# Altium PCB electrode_module3.3(1).PcbDoc
Units mm, origin at the board's own origin, x right, y up, seen from the top; angles counter-clockwise.
Board outline 69.48 x 24.97 mm, 2 copper layers (F.Cu, B.Cu); 56 components, 39 nets, 122 pads, 20 vias.
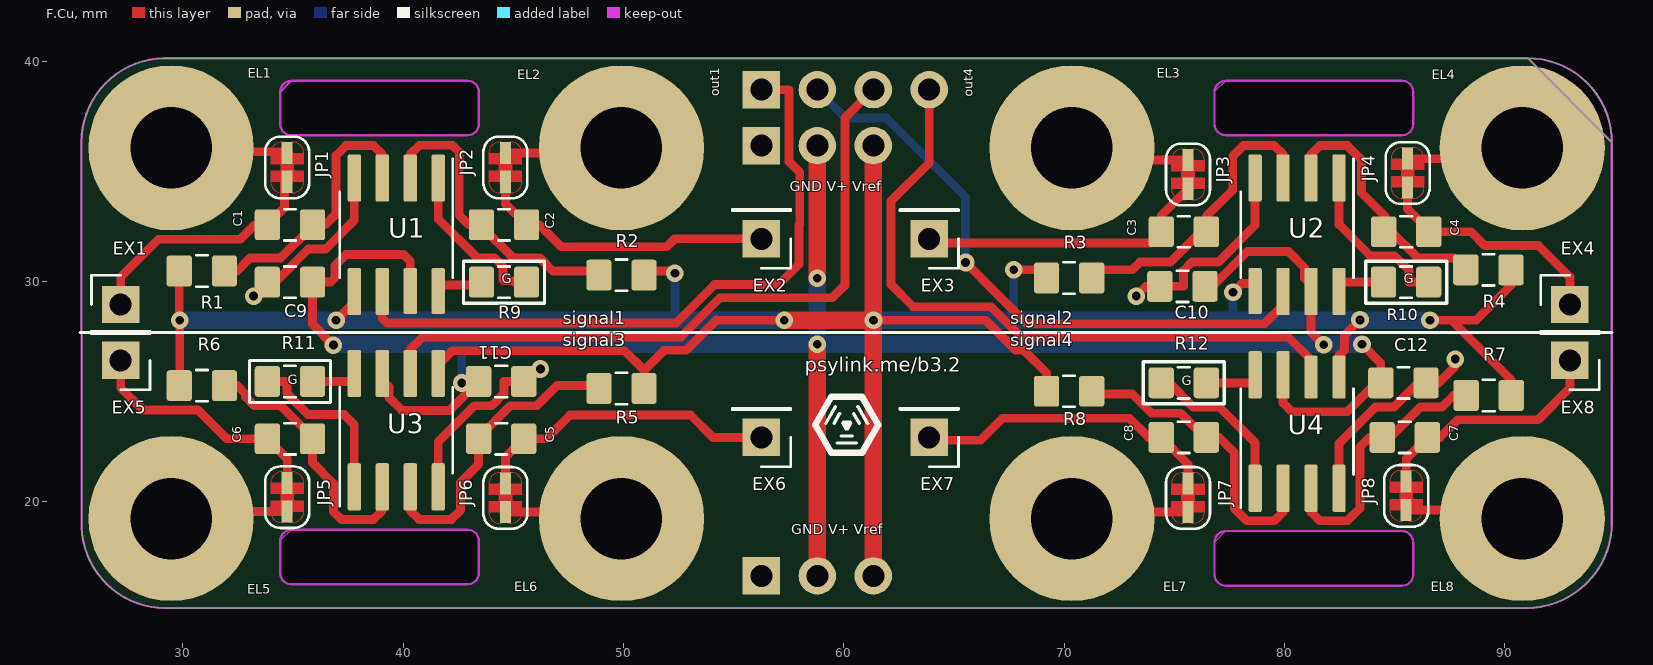
[diagram p0: F.Cu view]
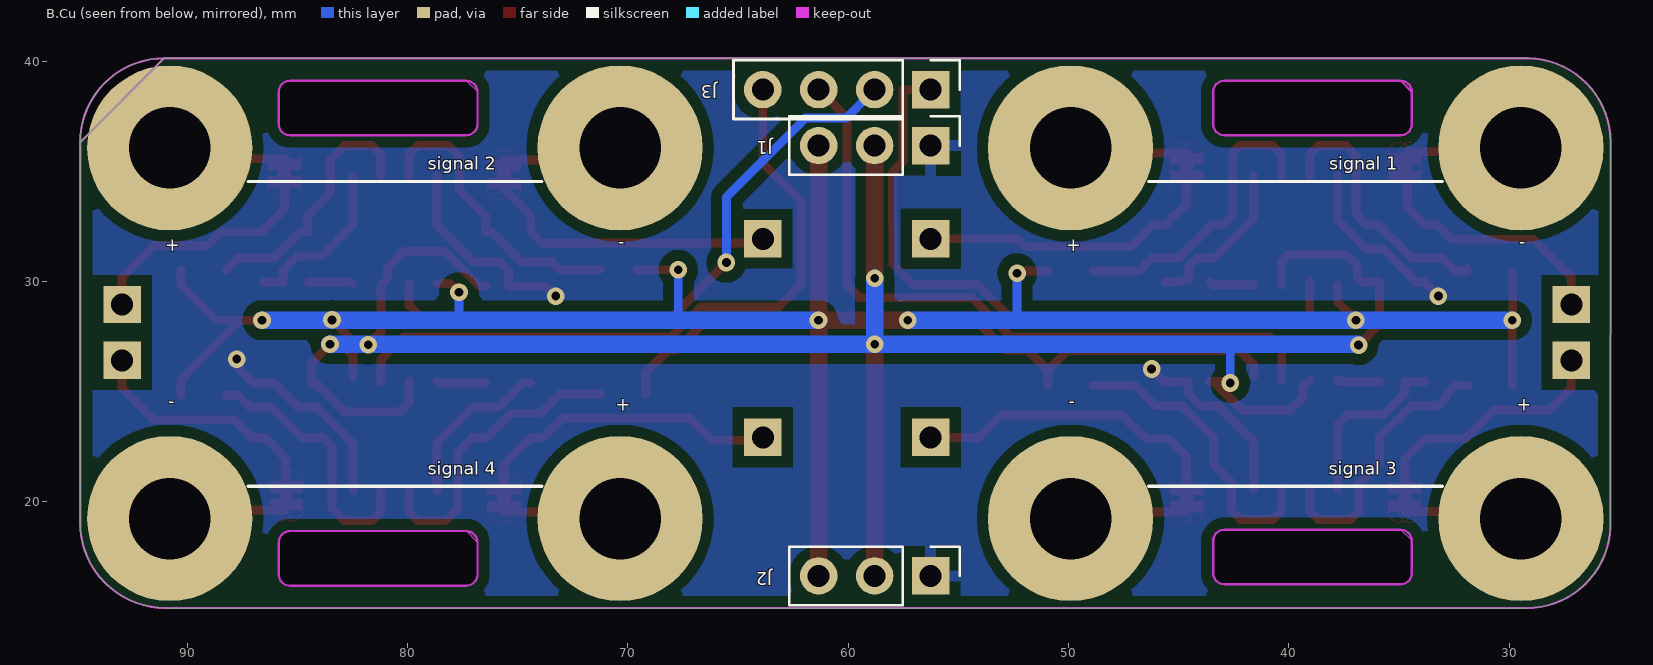
[diagram p1: B.Cu view, seen from below]

## Layer stack, top to bottom
F.Mask: solder mask 0.0102, Solder Resist, Dk 3.5
F.Cu: signal copper 0.0356
Dielectric 1: dielectric 0.32, FR-4, Dk 4.8
B.Cu: signal copper 0.0356
B.Mask: solder mask 0.0102, Solder Resist, Dk 3.5

## Board outline
94.869,36.322 ccw(c91.059,36.322) 91.059,40.132 29.464,40.132 ccw(c29.21,36.322) 25.392,36.322 25.4,18.86 ccw(c29.21,18.986) 29.21,15.174 90.995,15.176 ccw(c90.995,19.05) 94.869,19.05 94.869,36.322 ccw(c91.059,36.322) 94.869,36.322
cut-out: 34.925,39.126 34.727,39.087 34.559,38.974 34.446,38.806 34.407,38.608 34.417,38.608 34.407,37.148 34.446,36.949 34.559,36.781 34.727,36.669 34.925,36.63 34.925,36.639 42.926,36.63 43.124,36.669 43.292,36.781 43.405,36.949 43.444,37.148 43.434,37.148 43.444,38.608 43.405,38.806 43.292,38.974 43.124,39.087 42.926,39.126 42.926,39.116 34.925,39.126 34.727,39.087 34.559,38.974 34.446,38.806 34.407,38.608 34.925,39.116
cut-out: 77.343,18.679 77.145,18.64 76.977,18.527 76.864,18.359 76.825,18.161 76.835,18.161 76.825,16.7 76.864,16.502 76.977,16.334 77.145,16.222 77.343,16.183 77.343,16.192 85.344,16.183 85.542,16.222 85.71,16.334 85.823,16.502 85.862,16.7 85.852,16.7 85.862,18.161 85.823,18.359 85.71,18.527 85.542,18.64 85.344,18.679 85.344,18.669 77.343,18.679 77.145,18.64 76.977,18.527 76.864,18.359 76.825,18.161 76.835,18.161
cut-out: 76.825,38.608 76.864,38.806 76.977,38.974 77.145,39.087 77.343,39.126 77.343,39.116 85.344,39.126 85.542,39.087 85.71,38.974 85.823,38.806 85.862,38.608 85.852,38.608 85.862,37.148 85.823,36.949 85.71,36.781 85.542,36.669 85.344,36.63 85.344,36.639 77.343,36.639 77.343,36.63 77.145,36.669 76.977,36.781 76.864,36.949 76.825,37.148 76.835,37.148 76.825,38.608 76.864,38.806 76.977,38.974 77.145,39.087 77.343,39.126 77.343,39.116
cut-out: 34.407,18.224 34.446,18.423 34.559,18.591 34.727,18.703 34.925,18.742 34.925,18.732 42.926,18.742 43.124,18.703 43.292,18.591 43.405,18.423 43.444,18.224 43.434,18.224 43.444,16.764 43.405,16.566 43.292,16.398 43.124,16.285 42.926,16.246 42.926,16.256 34.925,16.256 34.925,16.246 34.727,16.285 34.559,16.398 34.446,16.566 34.407,16.764 34.417,16.764 34.407,18.224 34.446,18.423 34.559,18.591 34.727,18.703 34.925,18.742 34.925,18.732

## Design rules (kind name [scope] priority, off if disabled: settings)
Clearance "Clearence 0.508_Polygon" [InNamedPolygon('B.Cu-Earth')] p1: gap=0.508 ignorepadtopadclearanceinfootprint=FALSE
Clearance "Clearence 0.2_NetClass" [InNetClass('Default')] p2: gap=0.2 ignorepadtopadclearanceinfootprint=FALSE
HoleSize "Hole Size (Default)" [All] p1: absolutevalues=TRUE maxlimit=10 minlimit=0 maxpercent=80.000 minpercent=20.000
MinimumSolderMaskSliver [All] p1: minsoldermaskwidth=0
PolygonConnect Polygon_B.Cu-Earth_ConnectDirect [IsNamedPolygon('B.Cu-Earth') vs IsVia] p1: connectstyle=Direct reliefconductorwidth=0.254 reliefentries=4 polygonreliefangle="90 Angle" airgapwidth=0.254
PolygonConnect Polygon_B.Cu-Earth_ConnectRelief45 [IsNamedPolygon('B.Cu-Earth') vs (IsThruPin or IsSMTPin) and (PadShape_AllLayers = 'Round')] p2: connectstyle=Relief reliefconductorwidth=0.508 reliefentries=4 polygonreliefangle="45 Angle" airgapwidth=0.508
PolygonConnect Polygon_B.Cu-Earth_ConnectRelief90 [IsNamedPolygon('B.Cu-Earth') vs (IsThruPin or IsSMTPin) and (PadShape_AllLayers <> 'Round')] p3: connectstyle=Relief reliefconductorwidth=0.508 reliefentries=4 polygonreliefangle="90 Angle" airgapwidth=0.508
RoutingVias [All] p1: holewidth=0.711 width=1.27 viastyle="Through Hole" minholewidth=0.711 minwidth=1.27 maxholewidth=0.711 maxwidth=1.27
SilkToSilkClearance [All] p1: silktosilkclearance=0
SilkToSolderMaskClearance [IsPad] p1: minsilkscreentomaskgap=0 clearancetoexposedcopper=TRUE
SolderMaskExpansion [All] p1: expansion=0.102 istentingtop=FALSE
Width [All] p1: maxlimit=10 minlimit=0.2 preferedwidth=0.25 minimp=50.000000 maximp=50.000000 favimp=50.000000
26 further rules are at their usual default settings.

## Classes and differential pairs
net class Default: Earth GNDS in1 in2 in3 in4 in5 in6 in7 in8 Net-(C1-Pad2) Net-(C2-Pad1) Net-(C3-Pad2) Net-(C4-Pad1) Net-(C5-Pad2) Net-(C6-Pad1) Net-(C7-Pad2) Net-(C8-Pad1) Net-(EL1-Pad1) Net-(EL2-Pad1) Net-(EL3-Pad1) Net-(EL4-Pad1) Net-(EL5-Pad1) Net-(EL6-Pad1) Net-(EL7-Pad1) Net-(EL8-Pad1) Net-(R9-Pad1) Net-(R9-Pad2) Net-(R10-Pad1) Net-(R10-Pad2) Net-(R11-Pad1) Net-(R11-Pad2) Net-(R12-Pad1) Net-(R12-Pad2) out1 out2 out3 out4 VCC

## Components (designator, comment, footprint, x,y, rotation, side; value= is the part's Value field where it differs from the comment)
C1 "100pF" C_0805_2012Metric_Pad1.15x1.40mm_HandSolder 34.861,32.575 r0 top
C2 "100pF" C_0805_2012Metric_Pad1.15x1.40mm_HandSolder 44.577,32.575 r0 top
C3 "100pF" C_0805_2012Metric_Pad1.15x1.40mm_HandSolder 75.438,32.258 r0 top
C4 "100pF" C_0805_2012Metric_Pad1.15x1.40mm_HandSolder 85.534,32.258 r0 top
C5 "100pF" C_0805_2012Metric_Pad1.15x1.40mm_HandSolder 44.45,22.86 r180 top
C6 "100pF" C_0805_2012Metric_Pad1.15x1.40mm_HandSolder 34.861,22.86 r180 top
C7 "100pF" C_0805_2012Metric_Pad1.15x1.40mm_HandSolder 85.471,22.924 r180 top
C8 "100pF" C_0805_2012Metric_Pad1.15x1.40mm_HandSolder 75.438,22.924 r180 top
C9 "100nF" C_0805_2012Metric_Pad1.15x1.40mm_HandSolder 34.861,29.972 r180 top
C10 "100nF" C_0805_2012Metric_Pad1.15x1.40mm_HandSolder 75.374,29.781 r180 top
C11 "100nF" C_0805_2012Metric_Pad1.15x1.40mm_HandSolder 44.45,25.463 r0 top
C12 "100nF" C_0805_2012Metric_Pad1.15x1.40mm_HandSolder 85.407,25.4 r0 top
EL1 "Electrode" MountingHole_3.7mm_Pad 29.464,36.068 r270 top
EL2 "Electrode" MountingHole_3.7mm_Pad 49.911,36.068 r270 top
EL3 "Electrode" MountingHole_3.7mm_Pad 70.358,36.068 r270 top
EL4 "Electrode" MountingHole_3.7mm_Pad 90.805,36.068 r270 top
EL5 "Electrode" MountingHole_3.7mm_Pad 29.464,19.241 r270 top
EL6 "Electrode" MountingHole_3.7mm_Pad 49.911,19.241 r270 top
EL7 "Electrode" MountingHole_3.7mm_Pad 70.358,19.241 r270 top
EL8 "Electrode" MountingHole_3.7mm_Pad 90.805,19.241 r270 top
EX1 "ElectrodeTestPin" PinHeader_1x01_P2.54mm_Vertical 27.178,28.956 r0 top
EX2 "ElectrodeTestPin" PinHeader_1x01_P2.54mm_Vertical 56.261,31.941 r180 top
EX3 "ElectrodeTestPin" PinHeader_1x01_P2.54mm_Vertical 63.881,31.941 r180 top
EX4 "ElectrodeTestPin" PinHeader_1x01_P2.54mm_Vertical 92.964,28.956 r0 top
EX5 "ElectrodeTestPin" PinHeader_1x01_P2.54mm_Vertical 27.178,26.416 r180 top
EX6 "ElectrodeTestPin" PinHeader_1x01_P2.54mm_Vertical 56.261,22.924 r180 top
EX7 "ElectrodeTestPin" PinHeader_1x01_P2.54mm_Vertical 63.881,22.924 r180 top
EX8 "ElectrodeTestPin" PinHeader_1x01_P2.54mm_Vertical 92.964,26.416 r180 top
J1 "PowerInput" PinHeader_1x03_P2.54mm_Vertical 56.261,36.17 r90 bottom
J2 "PowerPassThru" PinHeader_1x03_P2.54mm_Vertical 56.261,16.637 r90 bottom
J3 "OutputPins" PinHeader_1x04_P2.54mm_Vertical 56.261,38.71 r90 bottom
JP1 "SolderJumper_2_Bridged" SolderJumper-2_P1.3mm_Bridged_RoundedPad1.0x1.5mm 34.734,35.179 r90 top
JP2 "SolderJumper_2_Bridged" SolderJumper-2_P1.3mm_Bridged_RoundedPad1.0x1.5mm 44.64,35.179 r90 top
JP3 "SolderJumper_2_Bridged" SolderJumper-2_P1.3mm_Bridged_RoundedPad1.0x1.5mm 75.629,34.861 r90 top
JP4 "SolderJumper_2_Bridged" SolderJumper-2_P1.3mm_Bridged_RoundedPad1.0x1.5mm 85.598,34.925 r90 top
JP5 "SolderJumper_2_Bridged" SolderJumper-2_P1.3mm_Bridged_RoundedPad1.0x1.5mm 34.734,20.208 r270 top
JP6 "SolderJumper_2_Bridged" SolderJumper-2_P1.3mm_Bridged_RoundedPad1.0x1.5mm 44.64,20.178 r270 top
JP7 "SolderJumper_2_Bridged" SolderJumper-2_P1.3mm_Bridged_RoundedPad1.0x1.5mm 75.629,20.178 r270 top
JP8 "SolderJumper_2_Bridged" SolderJumper-2_P1.3mm_Bridged_RoundedPad1.0x1.5mm 85.534,20.272 r270 top
R1 "1M/1%" R_0805_2012Metric_Pad1.15x1.40mm_HandSolder 30.861,30.48 r180 top
R2 "1M/1%" R_0805_2012Metric_Pad1.15x1.40mm_HandSolder 49.911,30.29 r180 top
R3 "1M/1%" R_0805_2012Metric_Pad1.15x1.40mm_HandSolder 70.231,30.162 r180 top
R4 "1M/1%" R_0805_2012Metric_Pad1.15x1.40mm_HandSolder 89.265,30.531 r180 top
R5 "1M/1%" R_0805_2012Metric_Pad1.15x1.40mm_HandSolder 49.911,25.146 r0 top
R6 "1M/1%" R_0805_2012Metric_Pad1.15x1.40mm_HandSolder 30.861,25.273 r0 top
R7 "1M/1%" R_0805_2012Metric_Pad1.15x1.40mm_HandSolder 89.281,24.828 r0 top
R8 "1M/1%" R_0805_2012Metric_Pad1.15x1.40mm_HandSolder 70.231,25.019 r0 top
R9 "100/1%" R_0805_2012Metric_Pad1.15x1.40mm_HandSolder 44.577,29.972 r180 top
R10 "100/1%" R_0805_2012Metric_Pad1.15x1.40mm_HandSolder 85.526,29.972 r180 top
R11 "100/1%" R_0805_2012Metric_Pad1.15x1.40mm_HandSolder 34.861,25.463 r0 top
R12 "100/1%" R_0805_2012Metric_Pad1.15x1.40mm_HandSolder 75.438,25.4 r0 top
U1 "INA128" SOIC-8_3.9x4.9mm_P1.27mm#1 39.688,32.122 r270 top
U2 "INA128" SOIC-8_3.9x4.9mm_P1.27mm#2 80.581,32.122 r270 top
U3 "INA128" SOIC-8_3.9x4.9mm_P1.27mm#3 39.688,23.25 r90 top
U4 "INA128" SOIC-8_3.9x4.9mm_P1.27mm#4 80.581,23.187 r90 top
Un0 "Comment" ? 18.161,25.4 r0 top

## Footprints (in the part's own frame and the unit in brackets; to place one, negate y for a bottom-side part, rotate by r counter-clockwise, add the part's x,y. Pads: shape width x height; smd on the part's side, far side on the other; paste and mask are expansions set on the pad)
C_0805_2012Metric_Pad1.15x1.40mm_HandSolder [mm]
  rrect22% 1.15x1.4 smd mask+0: 1(-1.025,0) 2(1.025,0)
  silkscreen extent -0.26,-0.71 0.26,0.71
MountingHole_3.7mm_Pad [mm]
  round 7.5 hole 3.7 paste-2539.97 mask+0: 1(0,0)
PinHeader_1x01_P2.54mm_Vertical [mm]
  rect 1.7x1.7 hole 1 paste-2539.97 mask+0: 1(0,0)
  silkscreen extent -1.33,-1.33 1.33,1.33
PinHeader_1x03_P2.54mm_Vertical [mm]
  rect 1.7x1.7 hole 1 paste-2539.97 mask+0: 1(0,0)
  rrect100% 1.7x1.7 hole 1 paste-2539.97 mask+0: 2(0,2.54) 3(0,5.08)
  silkscreen extent -1.33,-1.33 1.33,6.41
PinHeader_1x04_P2.54mm_Vertical [mm]
  rect 1.7x1.7 hole 1 paste-2539.97 mask+0: 1(0,0)
  rrect100% 1.7x1.7 hole 1 paste-2539.97 mask+0: 2(0,2.54) 3(0,5.08) 4(0,7.62)
  silkscreen extent -1.33,-1.33 1.33,8.95
R_0805_2012Metric_Pad1.15x1.40mm_HandSolder [mm]
  rrect22% 1.15x1.4 smd mask+0: 1(-1.025,0) 2(1.025,0)
  silkscreen extent -0.26,-0.71 0.26,0.71
SOIC-8_3.9x4.9mm_P1.27mm#1 [mm]
  rrect25% 2.15x0.6 smd mask+0: 1(-2.575,1.905) 2(-2.575,0.635) 3(-2.575,-0.635) 4(-2.575,-1.905) 5(2.575,-1.905) 6(2.575,-0.635)
  rrect25% 2.1x0.6 smd mask+0: 7(2.55,0.635) 8(2.55,1.905)
  silkscreen extent -3.45,-2.56 1.95,2.56
SOIC-8_3.9x4.9mm_P1.27mm#2 [mm]
  rrect25% 2.15x0.6 smd mask+0: 1(-2.575,1.905) 2(-2.575,0.635) 3(-2.575,-0.635) 4(-2.575,-1.905) 6(2.575,-0.635) 7(2.575,0.635) 8(2.575,1.905)
  rrect25% 2.1x0.6 smd mask+0: 5(2.55,-1.905)
  silkscreen extent -3.45,-2.56 1.95,2.56
SOIC-8_3.9x4.9mm_P1.27mm#3 [mm]
  rrect25% 2.15x0.6 smd mask+0: 1(-2.575,1.905) 2(-2.575,0.635) 3(-2.575,-0.635) 4(-2.575,-1.905) 5(2.575,-1.905) 6(2.575,-0.635) 7(2.575,0.635) 8(2.575,1.905)
  silkscreen extent -3.45,-2.56 1.95,2.56
SOIC-8_3.9x4.9mm_P1.27mm#4 [mm]
  rrect25% 2.15x0.6 smd mask+0: 1(-2.575,1.905) 2(-2.575,0.635) 3(-2.575,-0.635) 4(-2.575,-1.905) 7(2.575,0.635) 8(2.575,1.905)
  rrect25% 1.95x0.6 smd mask+0: 5(2.475,-1.905) 6(2.475,-0.635)
  silkscreen extent -3.45,-2.56 1.95,2.56
SolderJumper-2_P1.3mm_Bridged_RoundedPad1.0x1.5mm [mm]
  rect 1x0.5 smd paste-1 mask+0: 1(-0.65,0) 2(0.65,0)
  F.Cu circle w0: c0.65,0.25 r0.5
  F.Cu circle w0: c0.65,-0.25 r0.5
  F.Cu circle w0: c-0.65,0.25 r0.5
  F.Cu circle w0: c-0.65,-0.25 r0.5
  F.Cu region: 0.65,-0.75 0.15,-0.75 0.15,0.75 0.65,0.75
  F.Cu region: -0.15,-0.75 -0.65,-0.75 -0.65,0.75 -0.15,0.75
  F.Cu region: 0.25,-0.3 -0.25,-0.3 -0.25,0.3 0.25,0.3
  silkscreen extent -1.4,-1 1.4,1
? [mm]

## Part data
C1 C2 C3 C4 C5 C6 C7 C8 C9 C10 C11 C12: library part C_0805_2012Metric_Pad1.15x1.40mm_HandSolder, "Capacitor SMD 0805 (2012 Metric), square (rectangular) end terminal, IPC_7351 nominal with elongated pad for handsoldering. (Body size source: https://docs.google.com/spreadsheets/d/1BsfQQcO9C6DZCsRaXUlFlo91Tg2WpOkGARC1WS5S8t0/edit?usp=sharing), generated with kicad-footprint-generator"
EL1 EL2 EL3 EL4 EL5 EL6 EL7 EL8: library part MountingHole_3.7mm_Pad, "Mounting Hole 3.7mm"
EX1 EX2 EX3 EX4 EX5 EX6 EX7 EX8: library part PinHeader_1x01_P2.54mm_Vertical, "Through hole straight pin header, 1x01, 2.54mm pitch, single row"
J1 J2: library part PinHeader_1x03_P2.54mm_Vertical, "Through hole straight pin header, 1x03, 2.54mm pitch, single row"
J3: library part PinHeader_1x04_P2.54mm_Vertical, "Through hole straight pin header, 1x04, 2.54mm pitch, single row"
JP1 JP2 JP3 JP4 JP5 JP6 JP7 JP8: library part SolderJumper-2_P1.3mm_Bridged_RoundedPad1.0x1.5mm, "SMD Solder Jumper, 1x1.5mm, rounded Pads, 0.3mm gap, bridged with 1 copper strip"
R1 R2 R3 R4 R5 R6 R7 R8 R9 R10 R11 R12: library part R_0805_2012Metric_Pad1.15x1.40mm_HandSolder, "Resistor SMD 0805 (2012 Metric), square (rectangular) end terminal, IPC_7351 nominal with elongated pad for handsoldering. (Body size source: https://docs.google.com/spreadsheets/d/1BsfQQcO9C6DZCsRaXUlFlo91Tg2WpOkGARC1WS5S8t0/edit?usp=sharing), generated with kicad-footprint-generator"
U1 U2 U3 U4: library part SOIC-8_3.9x4.9mm_P1.27mm, "SOIC, 8 Pin (JEDEC MS-012AA, https://www.analog.com/media/en/package-pcb-resources/package/pkg_pdf/soic_narrow-r/r_8.pdf), generated with kicad-footprint-generator ipc_gullwing_generator.py"

## Via types
v1: diameter 0.8, hole 0.4, F.Cu to B.Cu, tented both sides, 20 vias

## Nets (pads, with @x,y where several pads share a name; then routed paths per layer and width w, separated by ;. In a path a pad name is that pad's centre, name@x,y a point inside that pad or via, vN(x,y) a via of type N, cw(c..) or ccw(c..) an arc to the next point about the centre after c; other vN are vias at no path point)
Earth: C9.2 C10.2 C11.2 C12.2 J1.1 J2.1 U1.4 U2.4 U3.4 U4.4 | length 35.1
  F.Cu w0.4: v1(33.21,29.337) 33.837,29.963 C9.2 34.192,29.972 35.696,31.475 36.481,31.475 37.782,32.777 37.782,33.821 U1.4@37.782,34.796 ; U3.4@41.593,20.576 41.593,21.551 41.593,22.722 43.234,24.363 44.019,24.363 44.577,24.921 44.577,25.463 C11.2 45.663,25.463 v1(46.228,26.029) ; v1(73.279,29.337) 73.724,29.781 C10.2 75.424,29.781 75.424,30.501 75.805,30.882 76.994,30.882 78.676,32.564 78.676,33.821 U2.4@78.676,34.796 ; U4.4@82.486,20.512 82.486,21.487 82.486,22.658 84.128,24.3 84.977,24.3 86.077,25.4 C12.2 87.007,25.4 87.757,26.15 v1(87.757,26.479)
GNDS: J1.3 J2.3 R1.2 R2.1 R3.2 R4.1 R5.2 R6.1 R7.2 R8.1 U1.5 U2.5 U3.5 U4.5 | length 134.8
  F.Cu w0.4: R6.1 29.858,25.295 v1(29.858,28.245) 29.836,28.266 R1.2@29.836,30.416 ; v1(36.957,28.245) 37.782,29.07 U1.5@37.782,29.847 ; U3.5@41.593,25.717 41.593,26.226 42.227,26.86 50.049,26.86 50.936,25.973 ; R5.2@50.936,25.273 50.936,25.973 ; R2.1@50.936,30.48 52.235,30.48 v1(52.337,30.378) ; 54.229,28.258 54.242,28.245 ; v1(57.302,28.245) 54.242,28.245 ; v1(61.354,28.245) 66.446,28.245 67.808,26.883 68.177,26.883 69.206,25.853 R8.1@69.206,24.892 ; v1(67.716,30.531) R3.2@69.587,30.531 ; v1(77.673,29.515) 78.068,29.91 U2.5@78.676,29.91 ; U4.5 82.486,26.642 82.728,26.883 82.728,27.546 v1(83.439,28.258) ; v1(86.614,28.245) 87.18,28.245 ; R4.1 90.29,29.831 88.704,28.245 87.18,28.245 ; R7.2 90.306,25.529 87.59,28.245 87.18,28.245 ; 50.936,25.973 51.846,26.883 52.854,26.883 54.216,28.245 54.242,28.245
  F.Cu w0.8: v1(57.302,28.245) v1(61.354,28.245) ; J2.3 J1.3
  B.Cu w0.4: 52.337,28.245 v1(52.337,30.378) ; 67.716,28.245 v1(67.716,30.531) ; 77.673,28.245 v1(77.673,29.515)
  B.Cu w0.8: v1(29.858,28.245) 30.226,28.245 36.462,28.245 51.003,28.245 v1(57.302,28.245) ; v1(61.354,28.245) 68.948,28.245 68.986,28.245 77.673,28.245 82.448,28.245 v1(86.614,28.245)
in1: C1.1 EX1.1 JP1.1 | length 11.2
  F.Cu w0.4: EX1.1 27.178,30.206 28.89,31.918 32.604,31.918 33.262,32.575 C1.1 34.608,33.346 JP1.1@34.608,34.592
in2: C2.2 EX2.1 JP2.1 | length 13.6
  F.Cu w0.4: JP2.1 44.64,33.537 C2.2 46.177,32.575 47.172,31.58 51.964,31.58 52.324,31.941 EX2.1
in3: C3.1 EX3.1 JP3.1 | length 13.2
  F.Cu w0.4: EX3.1@63.881,31.75 73.905,31.75 C3.1 74.413,32.996 JP3.1
in4: C4.2 EX4.1 JP4.1 | length 10.9
  F.Cu w0.4: JP4.1 85.598,33.283 C4.2@86.623,32.258 ; C4.2 88.473,32.258 89.1,31.631 91.539,31.631 92.964,30.206 EX4.1
in5: C6.2 EX5.1 JP5.1 | length 11.2
  F.Cu w0.4: EX5.1 27.178,25.166 28.171,24.173 30.674,24.173 31.987,22.86 C6.2 34.734,21.962 JP5.1
in6: C5.1 EX6.1 JP6.1 | length 14
  F.Cu w0.4: JP6.1@44.64,20.843 44.64,22.026 C5.1 46.498,22.86 47.577,23.939 53.042,23.939 54.058,22.924 EX6.1
in7: C8.2 EX7.1 JP7.1 | length 13.9
  F.Cu w0.4: EX7.1@63.881,22.796 66.211,22.796 67.206,23.792 72.97,23.792 73.838,22.924 C8.2 75.629,21.708 JP7.1@75.629,20.843
in8: C7.1 EX8.1 JP8.1 | length 11
  F.Cu w0.4: JP8.1 85.534,21.962 C7.1 87.071,22.924 87.876,23.728 91.526,23.728 92.964,25.166 EX8.1
Net-(C1-Pad2): C1.2 R1.1 U1.3 | length 12.5
  F.Cu w0.25: R1.1 R1.1@31.886,30.725
  F.Cu w0.4: R1.1 32.461,30.48 33.053,31.072 34.444,31.072 35.886,32.515 C1.2 36.461,32.575 36.957,33.071 36.957,35.724 37.405,36.172 38.652,36.172 39.052,35.772 U1.3@39.052,34.796
Net-(C2-Pad1): C2.1 R2.2 U1.2 | length 13.8
  F.Cu w0.4: U1.2@40.322,34.796 40.322,35.772 40.74,36.189 42.233,36.189 42.545,35.877 42.545,33.008 42.977,32.575 C2.1 43.552,32.515 44.995,31.072 46.196,31.072 46.788,30.48 R2.2@48.886,30.48
Net-(C3-Pad2): C3.2 R3.1 U2.3 | length 13.5
  F.Cu w0.4: R3.1@71.256,30.531 73.101,30.531 73.452,30.882 74.824,30.882 76.2,32.258 C3.2 76.463,32.958 77.66,34.155 77.66,35.687 78.145,36.172 79.546,36.172 79.947,35.772 U2.3@79.947,34.796
Net-(C4-Pad1): C4.1 R4.2 U2.2 | length 11.9
  F.Cu w0.4: U2.2@81.216,34.796 81.216,35.772 81.617,36.172 82.864,36.172 83.502,35.533 83.502,34.028 84.573,32.958 C4.1@84.573,32.258 ; C4.1 84.865,32.258 86.051,31.072 87.698,31.072 R4.2
Net-(C5-Pad2): C5.2 R5.1 U3.3 | length 13.7
  F.Cu w0.4: U3.3@40.322,20.576 40.322,19.6 40.723,19.2 42.187,19.2 42.608,19.621 42.608,20.892 43.425,21.708 C5.2 43.425,22.921 44.868,24.363 46.069,24.363 46.979,25.273 R5.1@48.886,25.273
Net-(C6-Pad1): C6.1 R6.2 U3.2 | length 12.3
  F.Cu w0.4: R6.2 32.461,25.273 32.842,24.892 32.842,24.764 33.242,24.363 34.444,24.363 35.886,22.921 C6.1 35.886,21.772 36.83,20.828 36.83,19.558 37.188,19.2 38.652,19.2 39.052,19.6 U3.2@39.052,20.576
Net-(C7-Pad2): C7.2 R7.1 U4.3 | length 12.2
  F.Cu w0.4: U4.3@81.216,20.512 81.216,19.537 81.617,19.137 82.864,19.137 83.439,19.712 83.439,22.491 83.871,22.924 C7.2 84.802,22.924 86.178,24.3 87.152,24.3 87.681,24.828 R7.1
Net-(C8-Pad1): C8.1 R8.2 U4.2 | length 13.7
  F.Cu w0.4: R8.2@71.256,24.892 72.526,24.892 73.101,24.892 73.969,24.024 75.297,24.024 76.397,22.924 C8.1 77.038,22.924 77.724,22.237 77.724,19.712 78.299,19.137 79.546,19.137 79.947,19.537 U4.2@79.947,20.512
Net-(EL1-Pad1): EL1.1 JP1.2 | length 8.4
  F.Cu w0.4: EL1.1@27.178,33.782 EL1.1 29.639,35.893 JP1.2@34.608,35.893
Net-(EL2-Pad1): EL2.1 JP2.2 | length 5.4
  F.Cu w0.4: JP2.2 49.672,35.829 EL2.1
Net-(EL3-Pad1): EL3.1 JP3.2 | length 5.5
  F.Cu w0.4: EL3.1 70.914,35.512 JP3.2
Net-(EL4-Pad1): EL4.1 JP4.2 | length 5.4
  F.Cu w0.4: JP4.2 90.312,35.575 EL4.1
Net-(EL5-Pad1): EL5.1 JP5.2 | length 8.6
  F.Cu w0.4: EL5.1@27.178,21.526 EL5.1 29.781,19.558 JP5.2
Net-(EL6-Pad1): EL6.1 JP6.2 | length 5.4
  F.Cu w0.4: JP6.2@44.64,19.543 49.609,19.543 EL6.1
Net-(EL7-Pad1): EL7.1 JP7.2 | length 5.4
  F.Cu w0.4: EL7.1 70.66,19.543 JP7.2@75.629,19.543
Net-(EL8-Pad1): EL8.1 JP8.2 | length 5.4
  F.Cu w0.4: JP8.2 90.424,19.621 EL8.1
Net-(R9-Pad1): R9.1 U1.1 | length 7.5
  F.Cu w0.4: U1.1@41.593,34.796 41.593,33.821 41.593,32.841 43.361,31.072 44.146,31.072 44.527,30.691 44.527,30.085 44.577,30.035 44.963,30.035 45.027,29.972 R9.1
Net-(R9-Pad2): R9.2 U1.8 | length 2
  F.Cu w0.4: U1.8@41.593,29.847 43.426,29.847 R9.2
Net-(R10-Pad1): R10.1 U2.1 | length 7.7
  F.Cu w0.4: U2.1@82.486,34.796 82.486,33.821 82.486,32.587 83.915,31.158 85.009,31.158 85.666,30.501 85.666,29.972 R10.1
Net-(R10-Pad2): R10.2 U2.8 | length 2.1
  F.Cu w0.4: U2.8@82.486,29.847 82.612,29.972 R10.2
Net-(R11-Pad1): R11.1 U3.1 | length 8
  F.Cu w0.4: R11.1 34.721,25.463 34.721,24.935 35.696,23.96 37.317,23.96 37.782,23.495 U3.1@37.782,20.576
Net-(R11-Pad2): R11.2 U3.8 | length 1.9
  F.Cu w0.4: R11.2 37.721,25.463 U3.8@37.782,25.525
Net-(R12-Pad1): R12.1 U4.1 | length 7.6
  F.Cu w0.4: R12.1 74.769,25.4 75.869,24.3 77.057,24.3 78.676,22.681 U4.1@78.676,20.512
Net-(R12-Pad2): R12.2 U4.8 | length 2.2
  F.Cu w0.4: R12.2 78.615,25.4 U4.8@78.676,25.462
out1: J3.1 U1.6 | length 31.8
  F.Cu w0.4: U1.6@39.052,28.969 U1.6@39.052,30.035 ; U1.6 39.052,28.321 39.263,28.11 52.385,28.11 54.135,29.861 57.039,29.861 57.975,30.797 57.975,32.575 58.001,32.601 58.001,34.963 57.511,35.453 57.511,38.71 J3.1
out2: J3.2 U2.6 | length 28.6
  F.Cu w0.4: v1(65.532,30.861) 66.943,29.45 66.943,29.445 68.305,28.083 79.094,28.083 79.947,28.935 U2.6@79.947,29.91
  B.Cu w0.4: J3.2 59.651,37.86 60.091,37.42 61.941,37.42 65.532,33.829 v1(65.532,30.861)
out3: J3.3 U3.6 | length 32
  F.Cu w0.4: U3.6@40.322,25.525 U3.6@40.322,26.008 ; U3.6@40.322,25.726 40.322,26.924 40.881,27.483 52.606,27.483 54.384,29.261 59.487,29.261 60.051,29.825 60.051,37.42 60.491,37.86 J3.3
out4: J3.4 U4.6 | length 31
  F.Cu w0.4: J3.4 63.881,35.382 62.141,33.642 62.141,29.87 63.167,28.845 66.695,28.845 68.057,27.483 80.171,27.483 81.216,26.437 U4.6@81.216,25.462
VCC: C9.1 C10.1 C11.1 C12.1 J1.2 J2.2 U1.7 U2.7 U3.7 U4.7 | length 102.1
  F.Cu w0.4: v1(36.83,27.114) 35.886,28.058 C9.1 36.703,29.972 36.893,30.162 36.893,30.71 37.405,31.222 40.025,31.222 40.322,30.924 U1.7@40.322,29.847 ; U3.7@39.052,25.525 39.352,25.225 39.352,24.743 39.945,24.15 42.112,24.15 C11.1 ; v1(42.656,25.394) 42.725,25.463 C11.1 ; C11.1@43.624,25.463 C11.1 ; C10.1 76.742,29.781 78.33,31.369 80.177,31.369 80.917,30.629 80.917,30.147 81.216,29.847 81.216,27.699 v1(81.788,27.127) ; U4.7@79.947,25.462 79.947,24.487 80.347,24.087 82.864,24.087 84.177,25.4 C12.1 84.383,26.298 v1(83.528,27.153)
  F.Cu w0.8: J2.2 v1(58.801,27.153) ; v1(58.801,30.15) J1.2
  B.Cu w0.4: 42.647,27.153 42.656,27.144 v1(42.656,25.394)
  B.Cu w0.8: v1@36.855,27.153 42.647,27.153 45.618,27.153 v1(58.801,27.153) ; v1(58.801,30.15) v1(58.801,27.153) ; J1.2 J1.2@58.826,36.17 ; v1(83.528,27.153) v1(58.801,27.153)

## Polygon pours and split planes (outlines as drawn)
Earth on B.Cu "B.Cu-Earth" (solid, remove dead copper, pour order 0): 23.939,14.351 23.939,40.894 57.912,40.894 57.912,28.639 59.69,28.639 59.69,40.894 95.313,40.894 95.313,14.351

## Keep-outs
Edge.Cuts:
  lines w0.1: 25.392,36.322 cw(c29.21,36.322) 29.464,40.132 ; 25.392,36.322 cw(c29.21,36.322) 29.464,40.132 ; 25.392,36.322 25.4,18.86 ; 25.392,36.322 25.4,18.86 ; 25.4,18.86 ccw(c29.21,18.986) 29.21,15.174 ; 25.4,18.86 ccw(c29.21,18.986) 29.21,15.174 ; 29.21,15.174 90.995,15.176 ; 29.21,15.174 90.995,15.176 ; 29.464,40.132 91.059,40.132 ; 29.464,40.132 91.059,40.132 ; 34.417,18.224 cw(c34.925,18.224) 34.925,18.732 ; 34.417,18.224 cw(c34.925,18.224) 34.925,18.732 ; 34.417,18.224 34.417,16.764 ccw(c34.925,16.764) 34.925,16.256 42.926,16.256 ccw(c42.926,16.764) 43.434,16.764 43.434,18.224 ccw(c42.926,18.224) 42.926,18.732 34.925,18.732 ; 34.417,37.148 ccw(c34.925,37.148) 34.925,36.639 ; 34.417,37.148 ccw(c34.925,37.148) 34.925,36.639 ; 34.417,37.148 34.417,38.608 ; 34.417,37.148 34.417,38.608 ; 34.417,38.608 cw(c34.925,38.608) 34.925,39.116 ; 34.417,38.608 cw(c34.925,38.608) 34.925,39.116 ; 34.417,38.608 cw(c34.925,38.608) 34.925,39.116 ; 34.417,38.608 cw(c34.925,38.608) 34.925,39.116 ; 34.417,38.608 34.925,39.116 ; 34.925,36.639 42.926,36.639 ; 34.925,36.639 42.926,36.639 ; 34.925,39.116 42.926,39.116 ; 34.925,39.116 42.926,39.116 ; 42.926,36.639 ccw(c42.926,37.148) 43.434,37.148 ; 42.926,36.639 ccw(c42.926,37.148) 43.434,37.148 ; 42.926,39.116 cw(c42.926,38.608) 43.434,38.608 ; 42.926,39.116 cw(c42.926,38.608) 43.434,38.608 ; 43.434,37.148 43.434,38.608 ; 43.434,37.148 43.434,38.608 ; 76.835,18.161 cw(c77.343,18.161) 77.343,18.669 ; 76.835,18.161 cw(c77.343,18.161) 77.343,18.669 ; 76.835,18.161 76.835,16.7 ccw(c77.343,16.7) 77.343,16.192 85.344,16.192 ccw(c85.344,16.7) 85.852,16.7 85.852,18.161 ccw(c85.344,18.161) 85.344,18.669 77.343,18.669 ; 76.835,38.608 cw(c77.343,38.608) 77.343,39.116 ; 76.835,38.608 cw(c77.343,38.608) 77.343,39.116 ; 76.835,38.608 76.835,37.148 ccw(c77.343,37.148) 77.343,36.639 85.344,36.639 ccw(c85.344,37.148) 85.852,37.148 85.852,38.608 ccw(c85.344,38.608) 85.344,39.116 77.343,39.116 ; 90.995,15.176 ccw(c90.995,19.05) 94.869,19.05 ; 90.995,15.176 ccw(c90.995,19.05) 94.869,19.05 ; 91.059,40.132 cw(c91.059,36.322) 94.869,36.322 ; 91.059,40.132 cw(c91.059,36.322) 94.869,36.322 ; 91.059,40.132 cw(c91.059,36.322) 94.869,36.322 ; 91.059,40.132 cw(c91.059,36.322) 94.869,36.322 ; 91.059,40.132 94.869,36.322 ; 94.869,19.05 94.869,36.322 ; 94.869,19.05 94.869,36.322

## Silkscreen, mask and mechanical layers (free items; w line width, h text height)
F.SilkS:
  region: 60.312,23.684 60.389,23.558 60.198,23.241 60.071,23.241 59.88,23.558 59.954,23.685
  lines w0.15: 25.336,27.686 94.869,27.686 ; 59.182,23.558 59.627,24.32 ; 59.563,23.558 59.817,24.003 ; 59.69,22.669 60.579,22.669 ; 59.88,22.987 60.389,22.987 ; 60.452,24.003 60.706,23.558 ; 60.642,24.32 61.087,23.558 ; 33.02,24.511 36.703,24.511 36.703,26.416 33.02,26.416 33.02,24.511 ; 42.735,29.019 42.735,30.924 46.419,30.924 46.419,29.019 42.735,29.019 ; 73.596,24.447 73.596,26.352 77.279,26.352 77.279,24.447 73.596,24.447 ; 83.693,29.019 83.693,30.924 87.376,30.924 87.376,29.019 83.693,29.019
  lines w0.3: 58.705,23.489 59.436,22.225 60.833,22.225 61.564,23.489 ; 58.705,23.495 59.436,24.765 60.833,24.765 61.564,23.501
  text "out1" at 54.49,38.41 h0.7 r90
  text "out4" at 65.985,38.381 h0.7 r90
  text "GND V+ Vref" at 57.548,33.935 h0.8
  text "G" at 44.472,29.759 h0.75
  text "G" at 85.43,29.759 h0.75
  text "signal1 / signal3" at 47.244,26.866 h1
  text "signal2 / signal4" at 67.564,26.866 h1
  text "psylink.me/b3.2" at 58.241,25.678 h1.1
  text "G" at 34.757,25.187 h0.75
  text "G" at 75.333,25.123 h0.75
  text "GND V+ Vref" at 57.612,18.377 h0.8
B.SilkS:
  lines w0.15: 33.02,20.701 46.355,20.701 ; 33.02,34.544 46.355,34.544 ; 73.914,20.701 87.249,20.701 ; 73.914,34.544 87.249,34.544
  text "signal 1" at 38.164,34.86 h1
  text "signal 2" at 79.094,34.86 h1
  text "-" at 29.539,31.335 h1
  text "-" at 70.433,31.335 h1
  text "+" at 50.107,31.173 h1
  text "+" at 91.001,31.173 h1
  text "-" at 49.986,24.096 h1
  text "-" at 90.88,24.096 h1
  text "+" at 29.66,23.934 h1
  text "+" at 70.554,23.934 h1
  text "signal 3" at 38.194,21.017 h1
  text "signal 4" at 79.1,21.017 h1
Dwgs.User:
  lines w0.15: 25.4,27.686 94.869,27.686 ; 39.688,18.224 39.688,37.084 ; 60.134,15.176 60.134,27.94 ; 60.147,28.55 60.147,40.132 ; 80.581,18.669 80.581,36.576
Cmts.User:
  text "rectangles around R9-R12 / indicate gain resistors" at 34.187,43.948 h1
  text "This hole in / the fill area / breaks the / ground loop" at 57.61,43.433 h1